# Altium PCB OSSI-1 EPS.PcbDoc
Units mil, origin at the board's own origin, x right, y up, seen from the top; angles counter-clockwise.
Board outline 3701 x 3465 mil, 2 copper layers (Top, Bottom), stack 34.252 mil thick; 102 components, 90 nets, 321 pads, 139 vias.
Unrouted connection lines stored in the file: 2.
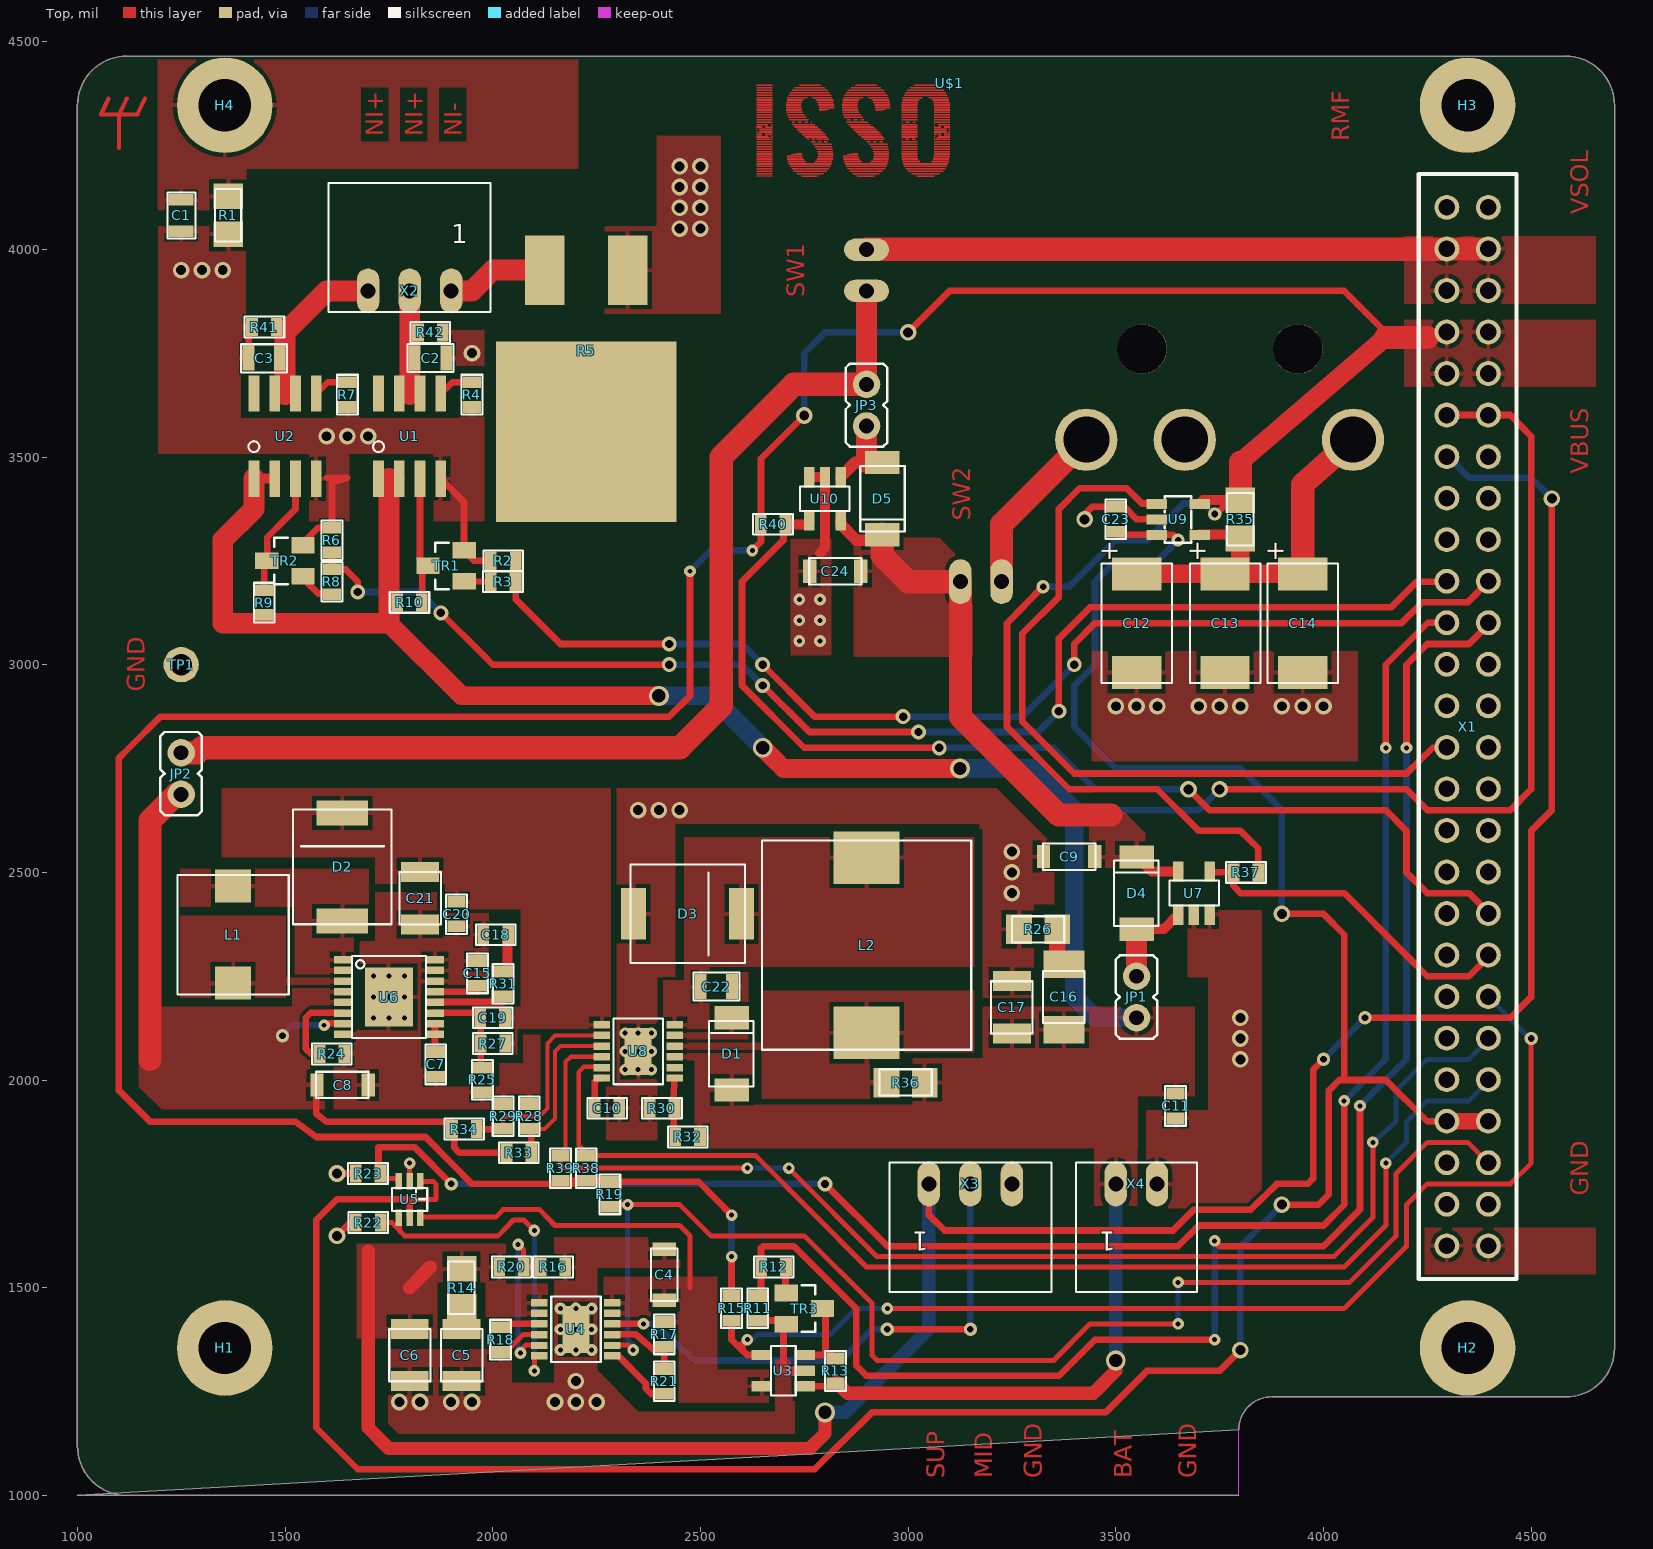
[diagram p0: Top view]
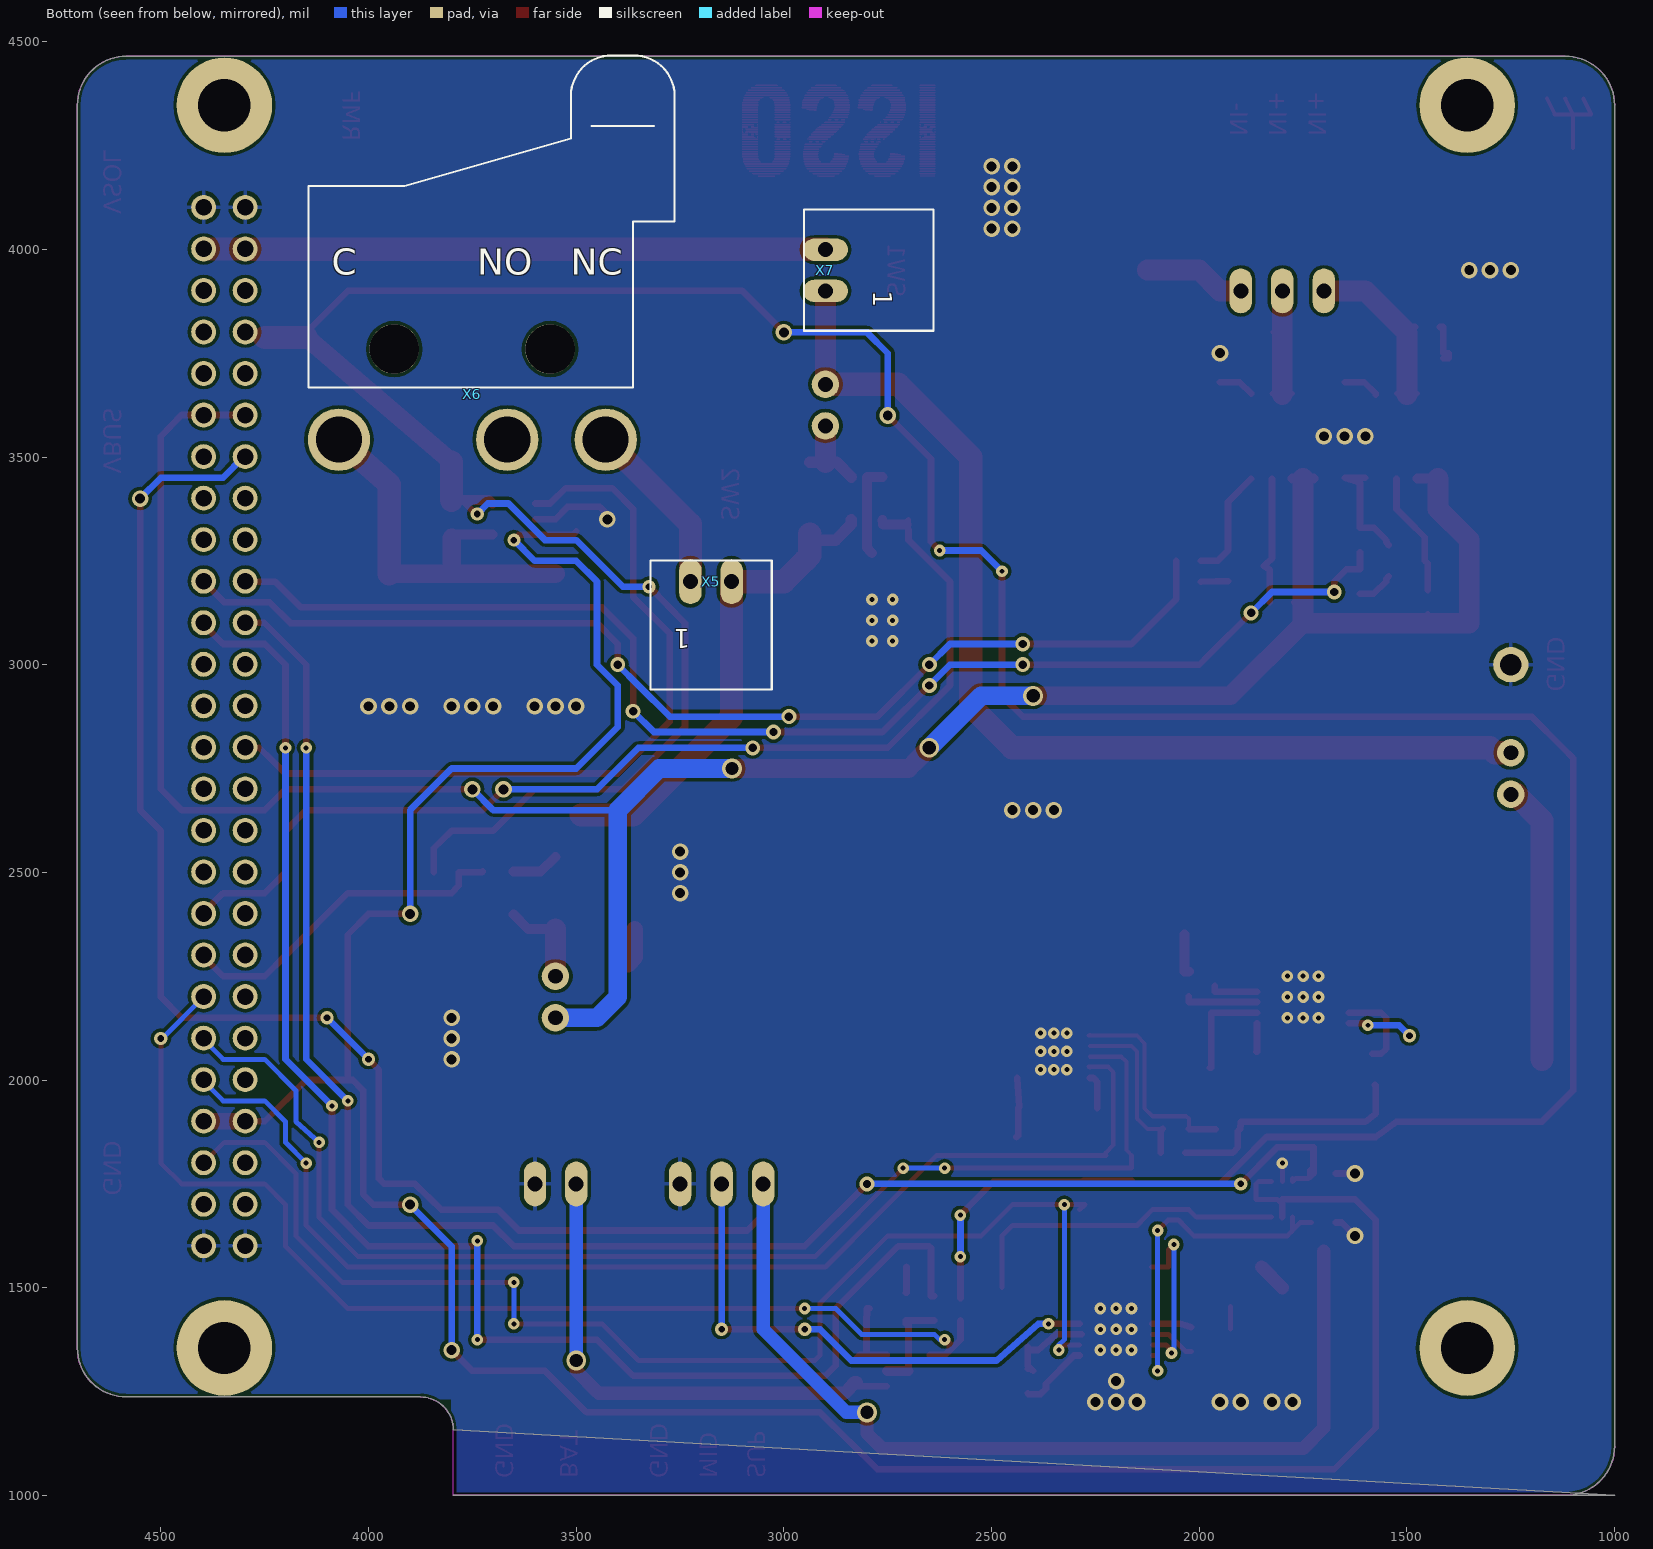
[diagram p1: Bottom view, seen from below]

## Layer stack, top to bottom
Top Solder: solder mask 0.4, Solder Resist, Dk 3.5
Top: signal copper 1.378
Dielectric 1: core 31.4961, FR-4, Dk 4.8
Bottom: signal copper 1.378
Bottom Solder: solder mask 0.4, Solder Resist, Dk 3.5

## Board outline
3796,1000 1119,1000 cw(c1119,1119) 1000,1119 1000,4347 cw(c1118.5,4346.5) 1119,4465 4583,4465 cw(c4583,4347) 4701,4347 4701,1355 cw(c4583,1355) 4583,1237 3875,1237 ccw(c3875,1158) 3796,1158 1000,1000

## Design rules (kind name [scope] priority, off if disabled: settings)
Clearance mdViaVia [IsVia vs IsVia] p1: gap=8
Clearance mdPadVia [IsPad vs IsVia] p2: gap=8
Clearance mdPadPad [IsPad vs IsPad] p3: gap=8
Clearance mdWireVia [(InLayerClass('Signal Layers') AND IsTrack) vs IsVia] p4: gap=8
Clearance mdWirePad [(InLayerClass('Signal Layers') AND IsTrack) vs IsPad] p5: gap=8
Clearance mdWireWire [(InLayerClass('Signal Layers') AND IsTrack) vs (InLayerClass('Signal Layers') AND IsTrack)] p6: gap=8
Clearance [All] p7: gap=8
HoleSize [All] p1: absolutevalues=TRUE maxlimit=100000 minlimit=10 maxpercent=80.000 minpercent=20.000
HoleToHoleClearance [All] p1: gap=8 allowstackedmicrovias=TRUE
PolygonConnect ThermalVias [IsVia] p1: connectstyle=Direct reliefconductorwidth=10 reliefentries=4 polygonreliefangle="90 Angle" airgapwidth=10
PolygonConnect [All] p2: connectstyle=Relief reliefconductorwidth=10 reliefentries=4 polygonreliefangle="90 Angle" airgapwidth=10
RoutingVias [All] p1: holewidth=28 width=50 viastyle="Through Hole" minholewidth=28 minwidth=50 maxholewidth=28 maxwidth=50
SilkToSilkClearance [All] p1 off: silktosilkclearance=10
SilkToSolderMaskClearance [IsPad] p1 off: minsilkscreentomaskgap=10 clearancetoexposedcopper=TRUE
SolderMaskExpansion [All] p1: expansion=4
Width [All] p1: maxlimit=100000 minlimit=10 preferedwidth=10
26 further rules are at their usual default settings.

## Components (designator, comment, footprint, x,y, rotation, side; value= is the part's Value field where it differs from the comment)
C1 "100nF" C0805(2012) 1250,4082 r270 top
C2 "1uF, 0805" C0805(2012) 1850,3738 r0 top
C3 "1uF, 0805" C0805(2012) 1450,3738 r180 top
C4 "2.2uF" C1206-GCM31 2413,1531 r90 top
C5 "22uF" C1210-GCM32 1925,1338 r270 top
C6 "22uF" C1210-GCM32 1800,1338 r270 top
C7 "100pF" C0603(1608) 1863,2038 r270 top
C8 "2.2uF" C1206-GCM31 1638,1988 r0 top
C9 "4.7uF, 1206" C1206-GCM31 3388,2538 r180 top
C10 "0 Ohm" C0603(1608) 2275,1932 r0 top
C11 "22nF" C0603(1608) 3644,1938 r270 top
C12 "220uF" C2917(7343)-Y 3550,3100 r270 top
C13 "220uF" C2917(7343)-Y 3763,3100 r270 top
C14 "220uF" C2917(7343)-Y 3950,3100 r270 top
C15 "0.1uF" C0603(1608) 1963,2257 r270 top
C16 "" C1210-TMK325 3375,2200 r90 top
C17 "10uF" C1210-GCM32 3250,2175 r90 top
C18 "10nF" C0603(1608) 2007,2350 r0 top
C19 "470pF" C0603(1608) 2000,2150 r180 top
C20 "0.1uF" C0603(1608) 1913,2400 r270 top
C21 "10uF" C1210-GCM32 1825,2438 r270 top
C22 "1uF, 100V, 1206" C0805(2012) 2538,2225 r0 top
C23 "0.1uF" C0603(1608) 3500,3350 r90 top
C24 "4.7uF, 1206" C1206-GCM31 2825,3225 r180 top
D1 "PMEG6020EP" PMEG6020EP 2575,2063 r90 top
D2 "STPS5L60" STPS5L60 1638,2513 r90 top
D3 "STPS5L60" STPS5L60 2469,2400 r0 top
D4 "PMEG3050BEP" PMEG6020EP 3550,2450 r90 top
D5 "PMEG3050BEP" PMEG6020EP 2938,3400 r270 top
H1 "" 3.2-PAD-ROUND 1355,1355 r0 top
H2 "" 3.2-PAD-ROUND 4347,1355 r0 top
H3 "" 3.2-PAD-ROUND 4347,4347 r0 top
H4 "" 3.2-PAD-ROUND 1355,4347 r0 top
JP1 "" JP1 3550,2200 r180 top
JP2 "" JP1 1250,2738 r180 top
JP3 "" JP1 2900,3625 r0 top
L1 "4.7uH" RLF7030 1375,2350 r90 top
L2 "10uH" RLF12545 2900,2325 r270 top
R1 "511" WSL1206 1363,4082 r90 top
R2 "100k" R0603(1608) 2025,3250 r0 top
R3 "1.5k" R0603(1608) 2025,3200 r180 top
R4 "1.2k" R0603(1608) 1950,3650 r90 top
R5 "1R5, 20W, 1%" PWR263S-20 2225,3950 r180 top
R6 "100k" R0603(1608) 1613,3300 r270 top
R7 "1.2k" R0603(1608) 1650,3650 r90 top
R8 "1.5k" R0603(1608) 1613,3200 r270 top
R9 "100k" R0603(1608) 1450,3150 r270 top
R10 "100k" R0603(1608) 1800,3150 r180 top
R11 "100k" R0603(1608) 2638,1450 r90 top
R12 "1.5k" R0603(1608) 2676,1550 r0 top
R13 "470k" R0603(1608) 2825,1300 r270 top
R14 "511" WSL1206 1925,1500 r90 top
R15 "470k" R0603(1608) 2575,1450 r90 top
R16 "750k" R0603(1608) 2145,1550 r0 top
R17 "1.5M" R0603(1608) 2413,1388 r270 top
R18 "2k" R0603(1608) 2019,1375 r90 top
R19 "470k" R0603(1608) 2282,1725 r270 top
R20 "1.5M" R0603(1608) 2045,1550 r0 top
R21 "750k" R0603(1608) 2413,1275 r270 top
R22 "470k" R0603(1608) 1700,1657 r0 top
R23 "470k" R0603(1608) 1700,1775 r180 top
R24 "17.8k" R0603(1608) 1613,2063 r180 top
R25 "30.9k" R0603(1608) 1975,2000 r90 top
R26 "0.1" WSL1206 3313,2363 r180 top
R27 "169k" R0603(1608) 2000,2088 r0 top
R28 "100k" R0603(1608) 2088,1913 r270 top
R29 "100k" R0603(1608) 2025,1913 r270 top
R30 "1.5M" R0603(1608) 2407,1932 r0 top
R31 "4.3k" R0603(1608) 2025,2232 r270 top
R32 "300k" R0603(1608) 2469,1863 r0 top
R33 "200k" R0603(1608) 2063,1825 r180 top
R34 "36k" R0603(1608) 1932,1882 r180 top
R35 "10m" WSL1206 3800,3350 r90 top
R36 "0.05" WSL1206 2994,1994 r0 top
R37 "470k" R0603(1608) 3813,2500 r0 top
R38 "470k" R0603(1608) 2225,1788 r270 top
R39 "470k" R0603(1608) 2163,1788 r270 top
R40 "470k" R0603(1608) 2675,3338 r180 top
R41 "1M" R0603(1608) 1450,3813 r0 top
R42 "1M" R0603(1608) 1850,3800 r180 top
TP1 "TP" TP-13 1250,3000 r0 top
TR1 "FDV301N" SOT23 1888,3238 r90 top
TR2 "FDV301N" SOT23 1500,3250 r90 top
TR3 "FDV301N" SOT23 2750,1450 r270 top
U1 "MAX890L" SO8 1800,3550 r0 top
U2 "MAX890L" SO8 1500,3550 r0 top
U3 "LTC4411" TSOT23-5 2700,1300 r90 top
U4 "LTC4425" MSE 2200,1400 r270 top
U5 "SN74LVC1T45-EP" SOT-6DCK 1800,1713 r180 top
U6 "LT3479" TSSOP16-FE 1750,2200 r270 top
U7 "LTC4411" TSOT23-5 3688,2450 r0 top
U8 "LT3652" MSE 2350,2069 r270 top
U9 "MAX4376" SOT23-5DBV 3650,3350 r270 top
U10 "LTC4411" TSOT23-5 2800,3400 r180 top
U$1 "" OSSILOGORECT1005 3100,4400 r180 top
X1 "ESQ-126-38-G-D" ESQ-126-XX-X-D 4347,2851 r0 top
X2 "5268-03" 5268-03 1800,3900 r0 top
X3 "5268-03" 5268-03 3150,1750 r180 top
X4 "5268-02" 5628-02 3550,1750 r180 top
X5 "5268-02" 5628-02 3175,3200 r0 bottom
X6 "" E62-10K 3363,3667 r180 bottom
X7 "5268-02" 5628-02 2900,3950 r270 bottom

## Footprints (in the part's own frame and the unit in brackets; to place one, negate y for a bottom-side part, rotate by r counter-clockwise, add the part's x,y. Pads: shape width x height; smd on the part's side, far side on the other; paste and mask are expansions set on the pad)
3.2-PAD-ROUND [mil] "3.2-PAD-ROUND"
  round 230 hole 126: B3,2(0,0)
5268-03 [mil] "5268-03"
  oval 54x108 hole 36: 1(100,0) 2(0,0) 3(-100,0)
  silkscreen extent -195,-51 195,260
5628-02 [mil] "5628-02"
  oval 54x108 hole 36: 1(50,0) 2(-49.21,0)
  silkscreen extent -146,-51 146,260
C0603(1608) [mil] "C0603(1608)"
  rect 28x44 smd: 1(-29.53,0) 2(30,0)
  silkscreen extent -47,-25 48,25
C0805(2012) [mil] "C0805(2012)"
  rect 28x60 smd: 1(-37.4,0) 2(38,0)
  silkscreen extent -55,-33 56,34
C1206-GCM31 [mil] "C1206-GCM31"
  rect 32x56 smd: P$1(-61.02,0) P$2(62,0)
  silkscreen extent -63,-31 63,32
C1210-GCM32 [mil] "C1210-GCM32"
  rect 48x91 smd: P$1(-62.99,0) P$2(63,0)
  silkscreen extent -63,-49 63,50
C1210-TMK325 [mil] "C1210-TMK325"
  rect 67x99 smd: P$1(-78.74,0) P$2(79,0)
  silkscreen extent -63,-49 63,50
C2917(7343)-Y [mil] "C2917(7343)-Y"
  rect 79x119 smd: 1(-118.11,0) 2(119,0)
  silkscreen extent -144,-85 144,85
E62-10K [mil] "E62-10K"
  round 119 hole 119: 1(-575.2,93) 1(-200,93)
  round 150 hole 111: C(-708.27,-125.2) NC(-66.14,-125.2) NO(-303.15,-125.2)
  silkscreen extent -781,0 100,800
ESQ-126-XX-X-D [mil] "ESQ-126-XX-X-D"
  round 60 hole 40: 1(-50,1250) 2(50,1250) 3(-50,1150) 4(50,1150) 5(-50,1050) 6(50,1050) 7(-50,950) 8(50,950) 9(-50,850) 10(50,850) 11(-50,750) 12(50,750) 13(-50,650) 14(50,650) 15(-50,550) 16(50,550) 17(-50,450) 18(50,450) 19(-50,350) 20(50,350) 21(-50,250) 22(50,250) 23(-50,150) 24(50,150) 25(-50,50) 26(50,50) 27(-50,-50) 28(50,-50) 29(-50,-150) 30(50,-150) 31(-50,-250) 32(50,-250) 33(-50,-350) 34(50,-350) 35(-50,-450) 36(50,-450) 37(-50,-550) 38(50,-550) 39(-50,-650) 40(50,-650) 41(-50,-750) 42(50,-750) 43(-50,-850) 44(50,-850) 45(-50,-950) 46(50,-950) 47(-50,-1050) 48(50,-1050) 49(-50,-1150) 50(50,-1150) 51(-50,-1250) 52(50,-1250)
  silkscreen extent -117,-1330 118,1330
JP1 [mil] "JP1"
  round 66 hole 36: 1(0,-50) 2(0,50)
  silkscreen extent -50,-100 50,100
MSE [mil] "MSE"
  rect 18x40 smd: 1(-63.98,-87.91) 2(-38.39,-87.91) 3(-12.8,-87.91) 4(13,-87.91) 5(39,-87.91) 6(64,-87.91) 7(64,88) 8(39,88) 9(13,88) 10(-12.8,88) 11(-38.39,88) 12(-63.98,88)
  rect 113x65 smd: 13(0,0)
  silkscreen extent -79,-59 79,60
OSSILOGORECT1005 [mil] "OSSILOGORECT1005"
  Top drawing of 1356 lines, arcs and shapes, not listed
PMEG6020EP [mil] "PMEG6020EP"
  rect 56x83 smd: A(-86.61,0) C(87,0)
  silkscreen extent -79,-53 79,54
PWR263S-20 [mil] "PWR263S-20"
  rect 95x167 smd: P$1(-100,0) P$2(100,0)
  rect 434x434 smd: TPAD(0,389)
R0603(1608) [mil] "R0603(1608)"
  rect 28x44 smd: 1(-29.53,0) 2(30,0)
  silkscreen extent -47,-25 48,25
RLF7030 [mil] "RLF7030"
  rect 79x87 smd: P$1(-116.14,0) P$2(117,0)
  silkscreen extent -144,-134 144,134
RLF12545 [mil] "RLF12545"
  rect 126x158 smd: P$1(-210.63,0) P$2(211,0)
  silkscreen extent -252,-252 252,252
SO8 [mil] "SO8"
  rect 26x87 smd: 1(-75,-102.36) 2(-25,-102.36) 3(25,-102.36) 4(75,-102.36) 5(75,103) 6(25,103) 7(-25,103) 8(-75,103)
  silkscreen extent -88,-38 -62,-12
SOT23 [mil] "SOT23"
  rect 40x56 smd: 1(-37.4,-43.31) 2(38,-43.31) 3(0,44)
  silkscreen extent -56,-6 56,26
SOT23-5DBV [mil] "SOT23-5DBV"
  rect 24x49 smd: 1(-37.4,-51.18) 2(0,-51.18) 3(38,-51.18) 4(38,52) 5(-37.4,52)
  silkscreen extent -56,-32 56,32
SOT-6DCK [mil] "SOT-6DCK"
  rect 16x40 smd: 1(-25.59,-43.31) 2(0,-43.31) 3(26,-43.31) 4(26,44) 5(0,44) 6(-25.59,44)
  silkscreen extent -42,-28 43,28
STPS5L60 [mil] "STPS5L60"
  rect 61x124 smd: A(-129.92,0) C(130,0)
  silkscreen extent -138,-118 138,119
TP-13 [mil] "TP-13"
  round 85 hole 52: TP(0,0)
TSOT23-5 [mil] "TSOT23-5"
  rect 25x49 smd: P$1(-37.4,-51.57) P$2(0,-51.57) P$3(38,-51.57) P$4(38,52) P$5(-37.4,52)
  silkscreen extent -59,-30 60,30
TSSOP16-FE [mil] "TSSOP16-FE"
  rect 18x44 smd: 1(-89.57,-110.24) 2(-63.98,-110.24) 3(-38.39,-110.24) 4(-12.8,-110.24) 5(13,-110.24) 6(39,-110.24) 7(64,-110.24) 8(90,-110.24) 9(90,111) 10(64,111) 11(39,111) 12(13,111) 13(-12.8,111) 14(-38.39,111) 15(-63.98,111) 16(-89.57,111)
  rect 141x116 smd: PPAD(0,0)
  silkscreen extent -98,-89 99,89
WSL1206 [mil] "WSL1206"
  rect 62x71 smd: P$1(-45.87,0) P$2(46,0)
  silkscreen extent -63,-31 63,32

## Part data
C1 C2 C3 C22: library part C0805(2012)
C4 C8 C9 C24: library part C1206-GCM31
C5 C6 C17 C21: library part C1210-GCM32
C7 C10 C11 C15 C18 C19 C20 C23: library part C0603(1608)
C12 C13 C14: library part C2917(7343)-Y
C16: library part C1210-TMK325
D4 D5: library part PMEG6020EP
H1 H2 H3 H4: library part 3.2-PAD-ROUND
JP1 JP2 JP3: library part JP1
L1: library part RLF7030
L2: library part RLF12545
R1 R14 R26 R35 R36: library part WSL1206
R2 R3 R4 R6 R7 R8 R9 R10 R11 R12 R13 R15 R16 R17 R18 R19 R20 R21 R22 R23 R24 R25 R27 R28 R29 R30 R31 R32 R33 R34 R37 R38 R39 R40 R41 R42: library part R0603(1608)
R5: library part PWR263S-20
TP1: library part TP-13
TR1 TR2 TR3: library part SOT23
U1 U2: library part SO8
U3 U7 U10: library part TSOT23-5
U4 U8: library part MSE
U5: library part SOT-6DCK
U6: library part TSSOP16-FE
U9: library part SOT23-5DBV
U$1: library part OSSILOGORECT1005
X1: library part ESQ-126-XX-X-D
X4 X5 X7: library part 5628-02
X6: library part E62-10K

## Via types
v1: diameter 28/28 (per signal layer), hole 12, Top to Bottom, 60 vias
v2: diameter 40/40 (per signal layer), hole 24, Top to Bottom, 52 vias
v3: diameter 36/36 (per signal layer), hole 20, Top to Bottom, 12 vias
v4: diameter 32/32 (per signal layer), hole 16, Top to Bottom, 10 vias
v5: diameter 48/48 (per signal layer), hole 32, Top to Bottom, 5 vias

## Nets (pads, with @x,y where several pads share a name; then routed paths per layer and width w, separated by ;. In a path a pad name is that pad's centre, name@x,y a point inside that pad or via, vN(x,y) a via of type N, cw(c..) or ccw(c..) an arc to the next point about the centre after c; other vN are vias at no path point)
3.3VOBC: C23.1 U5.1 U5.5 U9.3 X1.45 X1.46 | length 6886.5
  Top w12: U5.5@1800,1670 1800,1700 1813,1713 1863,1713 1863,1750 1857,1756 U5.1@1826,1756 ; U9.3@3599,3313 U9.3@3600,3313
  Top w16: U5.5@1800,1670 1800,1713 1625,1713 1575,1663 1575,1163 1675,1063 2775,1063 2913,1200 3475,1200 3575,1300 3750,1300 v2(3800,1350) ; C23.1@3500,3321 3508,3313 U9.3@3599,3313 ; U9.3@3600,3313 3638,3313 v4(3650,3300) ; v2(3900,1700) 3988,1700 4013,1725 4013,1975 4038,2000 ; v2(3900,2400) 4000,2400 4050,2350 4050,2200 4050,2000 ; X1.45 4250,1901 4150,2000 ; 4038,2000 4050,2000 ; 4038,2000 4050,2000 ; 4050,2000 4150,2000 ; 4050,2000 4150,2000 ; 4050,2000 4150,2000
  Top w40: X1.45 4300,1901 4300,1900 4301,1901 X1.46
  Bottom w16: v4(3650,3300) 3600,3250 3500,3250 3450,3200 3450,3000 3400,2950 3400,2850 3450,2800 3500,2750 3800,2750 3900,2650 v2(3900,2400) ; v2(3800,1350) 3800,1600 v2(3900,1700)
ANT_COIL1: C3.1 R41.2 U2.6 U2.7 X2.3 | length 520
  Top w12: U2.7 1498,3653 1500,3650 1503,3653 U2.6 ; C3.1@1488,3738 1488,3763 C3.1@1500,3750
  Top w16: R41.2 1513,3813
  Top w50: 1500,3650 1500,3750 1500,3800 1513,3813 1600,3900 X2.3
ANT_COIL2: C2.1 R42.2 U1.6 U1.7 X2.2 | length 366.9
  Top w12: U1.7 1798,3653 1800,3650 1823,3650 U1.6 ; C2.1@1800,3750 C2.1@1813,3738
  Top w16: 1800,3775 1800,3800 R42.2@1821,3800
  Top w50: 1800,3650 1800,3750 1800,3775 X2.2
ANT_DEPLOY1: R6.2 R8.1 X1.19 | length 3155.5
  Top w16: R6.2@1613,3271 1613,3230 1646,3230 1675,3200 v3(1675,3175) ; v3(1875,3125) 1975,3025 2000,3000 2025,3000 v3(2425,3000) ; v3(2650,2950) 2763,2838 v3(3025,2838) ; v3(3363,2888) 3363,3063 3438,3138 4163,3138 4225,3200 4297,3200 X1.19
  Bottom w16: v3(1675,3175) 1800,3175 1825,3175 v3(1875,3125) ; v3(2425,3000) 2600,3000 v3(2650,2950) ; v3(3025,2838) 3313,2838 v3(3363,2888)
ANT_DEPLOY2: R2.2 R3.1 X1.20 | length 2715.8
  Top w16: R2.2 2055,3200 2055,3158 2163,3050 v3(2425,3050) ; v3(2650,3000) 2775,2875 v3(2988,2875) ; v3(3400,3000) 3400,3050 3450,3100 4188,3100 4238,3150 4347,3150 X1.20
  Bottom w16: v3(2425,3050) 2500,3050 2600,3050 v3(2650,3000) ; v3(2988,2875) 3275,2875 3350,2950 v3(3400,3000)
BAT_-CHRG: R39.1 U8.4 X1.42 | length 3044.4
  Top w10: R39.1@2163,1818 2163,1819 2175,1832 2175,2044 2188,2056 U8.4@2263,2056
  Top w12: R39.1@2163,1818 2163,1788 v1(2613,1788) ; v1(2713,1788) 2925,1575 3750,1575 4025,1575 4119,1669 v1(4119,1850)
  Bottom w12: v1(2613,1788) v1(2713,1788) ; v1(4119,1850) 4175,1900 4175,1975 4250,2050 4350,2050 4397,2097 X1.42
BAT_-FAULT: R38.1 U8.5 X1.44 | length 2867.6
  Top w10: R38.1@2225,1818 2225,1825 2207,1844 2207,2019 2219,2032 2267,2032 U8.5@2263,2031
  Top w12: R38.1@2225,1818 2633,1818 2900,1550 3750,1550 4050,1550 4150,1650 v1(4150,1800)
  Bottom w12: v1(4150,1800) 4200,1850 4200,1900 4250,1950 4350,1950 4397,1997 X1.44
BAT_-ON: R37.1 U7.P$4 X1.38 | length 818.9
  Top w16: U7.P$4@3725,2502 3727,2500 3783,2500 3783,2468 3800,2450 3850,2450 4050,2450 4200,2300 4250,2250 4350,2250 4397,2297 X1.38
BAT_TEMP: X1.47
BEACON_-FAULT: X1.30
BEACON_OFF: X1.24
BEACON_SCL: X1.37
BEACON_SDA: X1.39
BUS_CS: U9.1 X1.27 | length 1926.4
  Top w16: U9.1@3599,3388 3563,3388 3525,3425 3413,3425 3363,3375 3363,3163 3275,3075 3275,2863 3400,2738 4200,2738 4263,2800 4300,2800 4300,2801 X1.27
COMMS_-FAULT: X1.32
COMMS_OFF: X1.25
COMMS_SCL: X1.41
COMMS_SDA: X1.43
GND: C1.2 C2.2 C3.2 C4.P$2 C5.P$2 C6.P$2 C7.2 C8.P$2 C9.P$2 C10.2 C11.2 C12.2 C13.2 C14.2 C15.1 C17.P$2 C18.1 C20.2 C21.P$2 C23.2 C24.P$2 D3.A R1.P$1 R2.1 R4.1 R5.P$1 R6.1 R7.1 R11.1 R16.2 R18.1 R22.1 R23.2 R24.1 R25.1 R26.P$2 R28.1 R29.1 R30.1 R41.1 R42.1 TP1.TP TR1.2 TR2.2 TR3.2 U1.4 U2.4 U3.P$2 U4.4 U4.13 U5.2 U6.8 U6.14 U6.15 U6.16 U6.PPAD U7.P$2 U7.P$3 U8.13 U9.2 U10.P$2 U10.P$3 X1.1 X1.2 X1.51 X1.52 X3.3 X4.2 | length 1647.4
  Top w12: U5.2@1800,1756 v1(1800,1800) ; R18.1@2019,1346 2032,1346 2074,1388 U4.4@2113,1388
  Top w16: C3.2@1413,3738 1400,3738 1400,3750 1413,3750 1413,3813 R41.1@1421,3813 ; TR2.2@1544,3288 1550,3295 1550,3300 1580,3330 1613,3330 1613,3438 1650,3450 1600,3450 ; v2(1625,1625) 1657,1657 R22.1@1671,1657 ; v2(1625,1775) R23.2@1671,1775 ; U1.4@1875,3448 1931,3392 1931,3275 1956,3250 R2.1@1996,3250 ; R11.1@2638,1421 2707,1421 2707,1413 2700,1413 2700,1300 ; v2(3425,3350) 3425,3363 3443,3380 C23.2 3521,3380 3550,3350 U9.2@3599,3350
  Top w24: 2700,1300 U3.P$2@2752,1300 ; 2788,3269 2800,3282 U10.P$2@2800,3450 ; U10.P$2@2800,3452 U10.P$2@2800,3450 ; U10.P$2@2800,3450 2794,3450 2793,3452 2763,3452 2799,3452 U10.P$2@2800,3450
  other v1: 2163,1350 2200,1350 2238,1350 2163,1400 2200,1400 2238,1400 2163,1450 2200,1450 2238,1450 2319,2025 2350,2025 2382,2025 2319,2069 2350,2069 2382,2069 2319,2113 2350,2113 2382,2113 1713,2150 1750,2150 1788,2150 1713,2200 1750,2200 1788,2200 1713,2250 1750,2250 1788,2250 2738,3057 2788,3057 2738,3107 2788,3107 2738,3157 2788,3157
  other v2: 1775,1225 1825,1225 1900,1225 1950,1225 2150,1225 2200,1225 2250,1225 2200,1275 3800,2050 3800,2100 3800,2150 3250,2450 3250,2500 3250,2550 2350,2650 2400,2650 2450,2650 3500,2900 3550,2900 3600,2900 3700,2900 3750,2900 3800,2900 3900,2900 3950,2900 4000,2900 1600,3550 1650,3550 1700,3550 1950,3750 1250,3950 1300,3950 1350,3950 2450,4050 2500,4050 2450,4100 2500,4100 2450,4150 2500,4150 2450,4200 2500,4200
LED_-FAULT: X1.28
LED_OFF: X1.23
LED_SCL: X1.33
LED_SDA: X1.35
N$1: L1.P$1 U6.3
N$2: R29.2 R34.1 U8.2 | length 508.8
  Top w10: R29.2 2025,1907 2032,1913 2113,1913 2132,1932 2132,2088 2150,2107 2267,2107 U8.2@2263,2108
  Top w16: R34.1@1961,1882 2024,1882 R29.2
N$3: C19.1 C20.1 C21.P$1 D2.C R27.2 U8.1
N$4: C16.P$2 R26.P$1 | length 90.3
  Top w40: R26.P$1@3359,2363 3359,2296 C16.P$2
N$5: C15.2 U6.13 | length 116
  Top w16: U6.13@1861,2213 1963,2213 C15.2
N$6: D2.A L1.P$2 U6.1 U6.2
N$7: C18.2 R31.1 | length 100
  Top w24: R31.1@2025,2261 2036,2261 C18.2@2036,2350
N$8: R31.2 U6.12 | length 178
  Top w16: U6.12@1861,2188 2025,2188 R31.2
N$9: C19.2 R25.2 R27.1 U6.11 | length 246
  Top w16: U6.11@1861,2162 1971,2162 1971,2150 1971,2088 1971,2030 R25.2
N$10: C7.1 U6.9 U6.10 | length 71
  Top w16: U6.10@1861,2137 1861,2111 1861,2068 C7.1@1863,2068
N$11: R24.2 U6.6 | length 207.7
  Top w16: R24.2 1563,2063 1550,2075 1550,2150 1562,2162 U6.6@1640,2162
N$12: R28.2 R33.1 U8.3 | length 413.4
  Top w10: R28.2 2090,1882 2125,1882 2150,1907 2150,2069 2163,2082 U8.3@2263,2082
  Top w16: R28.2 2093,1879 R33.1@2093,1825
N$13: C22.2 D1.C U8.11
N$14: R16.1 R20.2 U4.5 | length 421.3
  Top w12: v1(2061,1604) 2074,1591 2074,1550 R16.1@2115,1550 ; v1(2067,1343) 2067,1350 2080,1362 2112,1362 U4.5@2113,1362
  Bottom w12: v1(2061,1604) 2061,1350 v1(2067,1343)
N$16: C22.1 D3.C L2.P$1 U8.12
N$17: R30.2 R32.1 U8.7 | length 145.4
  Top w16: U8.7 2433,1935 2436,1932 2436,1866 R32.1@2440,1863
N$18: C9.P$1 C24.P$1 D4.C D5.C U7.P$5 U10.P$5 X5.2 | length 1298.9
  Top w24: D4.C 3586,2502 U7.P$5@3651,2502
  Top w28: U10.P$5@2838,3349 2838,3338 2875,3300 2925,3300 D5.C@2938,3314
  Top w56: D5.C@2938,3314 2938,3263 2950,3250 3000,3200 3126,3200 3126,2875 3363,2638 3488,2638
N$19: C10.1 U8.6 | length 84.7
  Top w16: C10.1@2246,1932 2246,1996 2250,2000 2255,2005 U8.6@2263,2005
N$20: R22.2 U4.6 U5.4 | length 850.6
  Top w12: R22.2 1757,1657 1788,1625 ; U5.4@1775,1670 1775,1638 1788,1625 ; v1(2100,1300) 2100,1313 2100,1338 2102,1337 U4.6@2113,1337 ; v1(2100,1638) 2075,1663 2050,1663 2013,1625 1788,1625
  Bottom w12: v1(2100,1638) v1(2100,1300) v1@2101,1300
N$21: C5.P$1 R14.P$1 | length 54
  Top w12: C5.P$1 1925,1450 R14.P$1@1925,1455
N$22: R13.1 TR3.3 U3.P$3 | length 223.3
  Top w16: U3.P$3@2752,1338 2800,1338 ; TR3.3 2800,1450 2801,1413 2801,1350 2800,1338 ; 2800,1338 R13.1@2818,1338 ; 2800,1338 R13.1@2818,1338 ; R13.1@2818,1338 2825,1330 R13.1@2818,1338
N$23: R12.2 TR3.1 | length 64
  Top w16: R12.2@2705,1550 2705,1488 TR3.1@2707,1488
N$24: C12.1 C13.1 C14.1 R35.P$1 U9.4 X6.C | length 964.5
  Top w24: U9.4@3702,3313 3792,3313 R35.P$1@3800,3305
  Top w45: C12.1@3550,3219 3763,3219 C13.1@3800,3219 ; R35.P$1@3800,3305 C13.1@3800,3219 ; C14.1@3950,3219 C13.1@3800,3219
  Top w56: C14.1@3950,3219 3950,3434 X6.C@4071,3542
N$29: R17.2 R21.1 U4.9 | length 225.9
  Top w16: U4.9@2283,1388 2288,1388 2344,1388 2388,1350 2400,1350 2405,1350 R17.2 2413,1313 2400,1300 2405,1305 R21.1@2413,1305
N$31: R21.2 U4.7 | length 171.7
  Top w16: U4.7@2288,1337 2302,1337 2369,1269 2369,1257 2382,1244 2411,1244 R21.2@2413,1246
N$33: R3.2 TR1.1 | length 65
  Top w16: TR1.1@1931,3201 1959,3201 R3.2@1996,3200
N$37: U2.8
N$38: U1.8
N$39: D5.A JP3.1 U10.P$1 | length 202.5
  Top w28: U10.P$1@2838,3452 2873,3487 2900,3487 D5.A@2938,3487
  Top w50: D5.A@2900,3487 JP3.1
N$40: R18.2 U4.3 | length 95.2
  Top w16: R18.2 2046,1413 U4.3@2113,1413
N$42: D4.A JP1.1 U7.P$1 | length 229.5
  Top w24: D4.A@3550,2364 3616,2364 U7.P$1@3651,2399
  Top w50: JP1.1 D4.A@3550,2364
N$44: C8.P$1 JP2.2 R33.2 R34.2 U6.4 U6.5 U6.7 | length 1441.3
  Top w16: v4(1494,2107) v4@1500,2100 ; C8.P$1 1575,1987 1575,1919 1600,1900 1900,1900 1900,1894 R34.2 1907,1877 1907,1838 1919,1825 R33.2 ; v1(1594,2132) 1599,2137 U6.7@1640,2137
  Top w56: 1175,2050 1175,2625 1238,2688 JP2.2
  Bottom w16: v4(1494,2107) 1519,2132 v1(1594,2132)
N$46: JP2.1 JP3.2 X7.1 | length 2594.9
  Top w50: JP3.2 X7.1@2900,3901
  Top w56: JP2.1 1288,2788 1300,2800 1350,2800 2450,2800 2550,2900 2550,3500 2700,3650 2725,3675 JP3.2
N$49: R8.2 TR2.1 | length 89.9
  Top w16: TR2.1@1544,3213 1550,3206 1550,3200 1580,3171 R8.2@1613,3171
N$50: R9.1 TR2.3 U2.3 | length 299.4
  Top w16: R9.1@1450,3180 1450,3244 1457,3250 1457,3307 1500,3350 1525,3375 U2.3@1525,3448
N$51: R10.1 TR1.3 U1.3 | length 315.9
  Top w16: U1.3@1825,3448 1825,3256 TR1.3@1845,3238 ; R10.1@1830,3150 1830,3228 TR1.3@1845,3238 ; TR1.3@1845,3237 TR1.3@1845,3238
N$52: R7.2 U2.5 | length 91.9
  Top w16: R7.2 1603,3680 U2.5 ; U2.5 1575,3650 U2.5
N$53: R4.2 U1.5 | length 85.9
  Top w16: U1.5 1903,3680 R4.2
N$54: X5.1 X6.NC | length 426.5
  Top w56: X5.1 3225,3338 X6.NC@3429,3542
N$56: 
N$57: R5.P$2 X2.1 | length 245.7
  Top w50: X2.1 1950,3900 2000,3950 2100,3950 R5.P$2
N$58:  | length 75
  Top w10: 1100,4244 1100,4319
N$59:  | length 214
  Top w10: 1075,4363 1057,4325 1100,4325 ; 1119,4363 1100,4325 ; 1163,4363 1144,4325 1100,4325
OBC_-FAULT: X1.34
OBC_OFF: X1.26
PANELTEMP_SCL: X1.29
PANELTEMP_SDA: X1.31
SC_-ON: R15.1 U3.P$4 X1.40 | length 2786.2
  Top w12: v1(2950,1450) 3975,1450 4050,1450 4150,1550 4200,1600 4200,1700 4250,1750 4450,1750 4500,1800 v4(4500,2100)
  Top w16: R15.1@2575,1421 2575,1375 2600,1350 ; v1(2613,1375) 2600,1363 2600,1350 ; 2600,1350 2613,1338 ; 2600,1350 2613,1338 ; 2613,1338 2649,1338 2613,1338
  Bottom w12: v1(2613,1375) 2625,1375 2638,1388 2813,1388 2875,1450 v1(2950,1450) ; X1.40 4497,2100 v4(4500,2100)
SC_-PFO: R19.2 U4.8 X1.48 | length 3173.3
  Top w12: R19.2@2282,1696 2282,1694 2288,1688 2275,1700 2300,1700 v1(2325,1700) 2450,1700 2525,1625 2750,1625 2913,1463 2913,1338 2925,1325 3200,1325 3350,1325 3438,1413 v1(3650,1413) ; U4.8@2288,1362 2326,1362 v1(2338,1350) ; v1(3650,1513) 4063,1513 4175,1625 4175,1775 4250,1850 4347,1850 X1.48
  Bottom w12: v1(2325,1700) 2325,1375 2338,1363 v1(2338,1350) ; v1(3650,1413) v1(3650,1513)
SCCHG_EN: R23.1 U5.3 X1.21 | length 4140.8
  Top w12: R23.1@1725,1775 1730,1775 1733,1772 1733,1768 1738,1763 1768,1763 1775,1756 1775,1762 U5.3@1775,1763
  Top w16: R23.1@1725,1775 1725,1813 1725,1838 1813,1838 v4(1900,1750) ; R23.1@1733,1768 R23.1@1733,1783 ; v3(2800,1750) 2950,1600 3650,1600 3700,1650 4000,1650 4050,1700 v1(4050,1950) ; v1(4150,2800) 4150,3000 4251,3101 X1.21
  Bottom w16: v4(1900,1750) v3(2800,1750) ; v1(4050,1950) 4150,2050 4150,2150 v1(4150,2800)
SCOUT_-PG: X1.50
SCOUT_EN: R11.2 R12.1 X1.22 | length 3692.9
  Top w16: R11.2 2646,1480 2646,1550 2646,1596 2650,1600 2725,1600 2750,1575 2850,1475 2875,1450 2875,1313 2900,1288 3363,1288 3450,1375 3475,1375 v1(3738,1375) ; v1(3738,1613) 3750,1600 3900,1600 4000,1600 4088,1688 4088,1875 4088,1888 v1(4088,1938) ; v1(4200,2800) 4200,3000 4250,3050 4350,3050 4397,3097 X1.22
  Bottom w16: v1(3738,1375) 3738,1600 v1(3738,1613) ; v1(4088,1938) 4200,2050 4200,2150 v1(4200,2800)
SENSE: L2.P$2 R36.P$1 U8.10
SOLAR_-ON: R40.1 U10.P$4 X1.36 | length 2733.2
  Top w12: R40.1@2700,3325 R40.1@2700,3350 ; R40.1@2700,3350 R40.1@2713,3338 ; R40.1@2700,3350 R40.1@2713,3338 ; R40.1@2713,3338 2762,3338 R40.1@2713,3338
  Top w16: R40.1@2700,3325 2700,3300 2600,3200 2600,2950 2750,2800 v3(3075,2800) ; v2(3675,2700) 3725,2650 4150,2650 4200,2600 4200,2500 4250,2450 4350,2450 4400,2400 4397,2400 X1.36
  Top w24: R40.1@2705,3338 2762,3338 U10.P$4@2763,3349
  Bottom w16: v3(3075,2800) 3350,2800 3450,2700 v2(3675,2700)
SOLAR_CS1: X1.15
SOLAR_CS2: X1.14
SOLAR_CS3: X1.17
SOLAR_CS4: X1.16
SOLAR_CS5: X1.18
STRUT_GND: C1.1 H4.B3,2 R1.P$2
SUPERCAP_TEMP: X1.49
VBAT: C11.1 C16.P$1 C17.P$1 D1.A JP1.2 R9.2 R10.2 R13.2 R32.2 R36.P$2 U1.1 U1.2 U2.1 U2.2 U3.P$1 U8.9 X1.11 X1.12 X4.1 | length 7331.4
  Top w16: 1450,3100 R9.2@1450,3121 ; 1750,3100 R10.2@1771,3150 ; U3.P$1@2752,1263 2818,1263 R13.2@2825,1271 ; v2(3750,2700) 4200,2700 4250,2650 4450,2650 4500,2700 4500,2750 4500,3550 4450,3601 X1.11 X1.12
  Top w24: U2.1@1425,3448 U2.2@1475,3448 ; U1.1@1725,3448 1750,3448 U1.2@1775,3448
  Top w32: R13.2@2825,1271 2830,1271 2850,1250 2855,1246 3246,1246 3446,1246 3450,1250 3500,1300 v5(3500,1325)
  Top w45: 1750,3100 1925,2925 v5(2400,2925) ; v5(2650,2800) 2675,2775 2700,2750 v5(3125,2750)
  Top w50: U2.1@1425,3448 1425,3375 1350,3300 1350,3100 1450,3100 1750,3100 1750,3125 1750,3448
  Bottom w10: X4.1 X4.1@3501,1750
  Bottom w16: 3400,2650 3700,2650 v2(3750,2700)
  Bottom w32: v5(3500,1325) X4.1
  Bottom w45: v5(2400,2925) 2525,2925 v5(2650,2800) ; v5(3125,2750) 3300,2750 3400,2650 3400,2200 3450,2150 JP1.2
VBUS: R15.2 R19.1 R35.P$2 R37.2 R38.2 R39.2 R40.2 U9.5 X1.7 X1.8 X1.9 X1.10 | length 9064.2
  Top w12: R15.2@2575,1475 R15.2
  Top w16: R39.2 2200,1758 ; v1(2475,3225) 2475,2925 2425,2875 1200,2875 1125,2800 1100,2775 1100,1975 1175,1900 1525,1900 1575,1863 1838,1863 1900,1800 1950,1750 2175,1750 2193,1750 2200,1758 ; R15.2@2575,1475 R15.2 v1(2575,1575) ; v1(2575,1675) 2496,1755 2282,1755 2278,1758 R38.2 2200,1758 ; v1(2625,3275) 2646,3296 2646,3338 2646,3496 v2(2750,3600) ; v2(3000,3800) 3100,3900 4050,3900 4150,3800 4150,3788 ; v4(3325,3188) 3238,3100 3238,2850 3388,2700 3600,2700 3700,2600 3800,2600 3843,2558 R37.2 ; v4(3738,3363) 3742,3363 R35.P$2@3775,3396
  Top w24: U9.5@3702,3388 3710,3396 3775,3396 R35.P$2
  Top w45: 3800,3488 4150,3788
  Top w56: R35.P$2 3800,3488 ; 4150,3788 4250,3788
  Bottom w16: v1(2475,3225) 2525,3275 v1(2625,3275) ; v1(2575,1575) v1(2575,1675) ; v2(2750,3600) 2750,3750 2800,3800 v2(3000,3800) ; v4(3325,3188) 3388,3188 3500,3300 3575,3300 3663,3388 3713,3388 v4(3738,3363)
VMID: U4.10 X3.2 | length 1276.3
  Top w16: U4.10@2288,1413 2338,1413 v1(2363,1413) ; v4(2950,1400) v4(3150,1400)
  Bottom w16: v1(2363,1413) 2388,1413 2488,1325 2838,1325 2913,1400 v4(2950,1400) ; v4(3150,1400) X3.2
VSC_IN: C4.P$1 R17.1 U3.P$5 U4.11 U4.12 U5.6 | length 807.8
  Top w12: U5.6@1826,1670 2007,1670 2025,1688 2113,1688 2150,1650 2450,1650 2475,1625 2475,1500
VSOLAR: X1.3 X1.4 X1.5 X1.6 X7.2 | length 1498
  Top w56: X7.2@2900,4000 4300,4000 4300,4001 X1.4
VSUPERCAP: C6.P$1 R14.P$2 R20.1 U4.1 U4.2 X1.13 X3.1 | length 5806.8
  Top w16: X3.1 3050,1675 3088,1638 3638,1638 3688,1688 3825,1688 3888,1750 3963,1750 3975,1763 3975,1988 3975,2025 v4(4000,2050) ; v4(4100,2150) 4450,2150 4500,2200 4500,2350 4500,2600 4550,2650 v2(4550,3400)
  Top w32: 1700,1588 1700,1163 1750,1113 2763,1113 2800,1150 v5(2800,1200) ; 1800,1500 1850,1550
  Bottom w16: v4(4000,2050) v4(4100,2150) ; X1.13 4300,3501 4350,3450 4500,3450 v2(4550,3400)
  Bottom w32: v5(2800,1200) 2850,1200 3050,1400 X3.1
pads on no net: H1.B3,2 H2.B3,2 H3.B3,2 R5.TPAD U8.8 X6.1 X6.NO

## Polygon pours and split planes (outlines as drawn)
N$1 on Top "Top-N$1" (solid, remove dead copper, pour order 2): 1248,2396 1502,2396 1502,2246 1659,2246 1659,2230 1502,2230 1502,2198 1248,2198
N$3 on Top "Top-N$3" (solid, remove dead copper, pour order 4): 1348,2702 1348,2536 1717,2536 1717,2473 1886,2473 1886,2411 2067,2411 2067,2177 2017,2177 2017,2055 2059,2055 2059,2123 2284,2123 2284,2702
N$6 on Top "Top-N$6" (solid, remove dead copper, pour order 6): 1248,2509 1248,2417 1523,2417 1523,2255 1665,2255 1665,2348 1702,2348 1702,2509
GND on Top "Top-GND" (solid, remove dead copper, pour order 10): 1405,4055 1405,3793 1430,3793 1430,3720 1393,3720 1393,3593 1620,3593 1620,3630 1680,3630 1680,3593 1920,3593 1920,3630 1980,3630 1980,3345 1858,3345 1858,3508 1655,3508 1655,3345 1558,3345 1558,3508 1195,3508 1195,4055
GND on Top "Top-GND 1" (solid, remove dead copper, pour order 12): 1870,3720 1870,3805 1980,3805 1980,3720
GND on Top "Top-GND 2" (solid, remove dead copper, pour order 14): 2549,4274 2549,3845 2270,3845 2270,4055 2395,4055 2395,4274
GND on Top "Top-GND 3" (solid, remove dead copper, pour order 16): 1990,2402 1865,2402 1865,2452 1717,2452 1717,2334 1680,2334 1680,2121 1617,2121 1617,1930 2115,1930 2115,2109 2073,2109 2073,2040 2017,2040 2017,1984 1890,1984 1890,2027 1827,2027 1827,2230 1990,2230
GND on Top "Top-GND 4" (solid, remove dead copper, pour order 18): 2396,1855 2273,1855 2273,1984 2298,1984 2298,2702 2984,2702 2984,2617 2440,2617 2440,2248 2396,2248
GND on Top "Top-GND 5" (solid, remove dead copper, pour order 20): 3180,2198 3302,2198 3302,2423 3352,2423 3352,2563.83 3213.83,2702 2948,2702 2948,2617 3173,2617 3173,2605 3180,2605
GND on Top "Top-GND 6" (solid, remove dead copper, pour order 22): 2815,3302 2815,3023 2717,3023 2717,3302
GND on Top "Top-GND 7" (solid, remove dead copper, pour order 24): 3573,1927 3723,1927 3723,2248 3673,2248 3673,2409 3852,2409 3852,1692 3573,1692
GND on Top "Top-GND 8" (solid, remove dead copper, pour order 26): 3442,3033 4083,3033 4083,2767 3442,2767
GND on Top "Top-GND 9" (solid, remove dead copper, pour order 28): 1748,1174.17 1748,1352 2046,1352 2046,1271 2148,1271 2148,1621 2452,1621 2452,1548 2252,1548 2252,1300.83 2350.83,1202 2680,1202 2680,1327 2721,1327 2721,1227 2727,1227 2727,1148 1774.17,1148
GND on Top "Top-GND 10" (solid, remove dead copper, pour order 30): 4244,1644 4656,1644 4656,1532 4244,1532
N$16 on Top "Top-N$16" (solid, remove dead copper, pour order 32): 2411,2123 2411,2240 2461,2240 2461,2584 3159,2584 3159,2273 2521,2273 2521,2123
N$13 on Top "Top-N$13" (solid, remove dead copper, pour order 34): 2411,2098 2615,2098 2615,2259 2548,2259 2548,2115 2411,2115
SENSE on Top "Top-SENSE" (solid, remove dead copper, pour order 36): 3159,2215 3159,2067 2984,2067 2984,1955 2648,1955 2648,2073 2411,2073 2411,2090 2648,2090 2648,2215
VBUS on Top "Top-VBUS" (solid, remove dead copper, pour order 38): 4194,3831 4656,3831 4656,3669 4194,3669
N$18 on Top "Top-N$18" (solid, remove dead copper, pour order 40): 3436,2511 3436,2646 3519.83,2646 3571,2594.83 3571,2511
N$18 on Top "Top-N$18 1" (solid, remove dead copper, pour order 42): 2869,3306 2869,3019 3156,3019 3156,3224.49 3074.49,3306
VSC_IN on Top "Top-VSC_IN" (solid, remove dead copper, pour order 44): 2267,1430 2267,1527 2540,1527 2540,1302 2665,1302 2665,1223 2448,1223 2448,1411 2386,1411 2386,1430
VSOLAR on Top "Top-VSOLAR" (solid, remove dead copper, pour order 46): 4194,4031 4656,4031 4656,3869 4194,3869
VSUPERCAP on Top "Top-VSUPERCAP" (solid, remove dead copper, pour order 48): 1673,1379 1866,1379 1866,1513 1983,1513 1983,1430 2133,1430 2133,1510 2031,1510 2031,1606 1673,1606
N$44 on Top "Top-N$44" (solid, remove dead copper, pour order 50): 1665,2221 1665,2180 1559,2180 1559,2021 1596,2021 1596,1930 1203.18,1930 1148,1984.16 1148,2177 1517,2177 1517,2221
VBAT on Top "Top-VBAT" (solid, remove dead copper, pour order 52): 2411,2065 2411,2048 2486,2048 2486,1836 3448,1836 3448,1698 3552,1698 3552,1836 3553,1836 3553,1961 3690,1961 3690,2177 3180,2177 3180,2052 3011,2052 3011,1940 2627,1940 2627,2065
STRUT_GND on Top "Top-STRUT_GND" (solid, remove dead copper, pour order 54): 1194,4456 2206,4456 2206,4194 1406,4194 1406,4094 1194,4094
GND on Bottom "Bottom-GND" (solid, remove dead copper, pour order 8): 4706,4470 4706,1232 3801,1232 3801,995 995,995 995,4470

## Keep-outs
Keep-Out Layer:
  lines w0: 1000,1119 ccw(c1119,1119) 1119,1000 3796,1000 3796,1158 cw(c3875,1158) 3875,1237 4583,1237 ccw(c4583,1355) 4701,1355 4701,4347 ccw(c4583,4347) 4583,4465 1119,4465 ccw(c1118.5,4346.5) 1000,4347 1000,1119

## Other copper
Top:
  text "NI+" at 1737,4272 h42.5 r90
  text "NI+" at 1831,4272 h42.5 r90
  text "NI-" at 1925,4272 h42.5 r90
  text "RMF" at 4062,4260 h42.5 r90
  text "VSOL" at 4637,4085 h42.5 r90
  text "SW1" at 2750,3885 h42.5 r90
  text "VBUS" at 4637,3460 h42.5 r90
  text "SW2" at 3150,3347 h42.5 r90
  text "GND" at 1162,2935 h42.5 r90
  text "GND" at 4637,1722 h42.5 r90
  text "SUP" at 3087,1041 h42.5 r90
  text "MID" at 3202,1041 h42.5 r90
  text "GND" at 3322,1041 h42.5 r90
  text "BAT" at 3538,1041 h42.5 r90
  text "GND" at 3694,1041 h42.5 r90
Bottom:
  pour cut-out net N$56: 1000,1000 1010,1000 1010,1010 1000,1010
  pour cut-out net N$56: 1000,1000 1010,1000 1010,1010 1000,1010
  pour cut-out net N$56: 1000,1000 1010,1000 1010,1010 1000,1010
  pour cut-out net N$56: 1000,1000 1010,1000 1010,1010 1000,1010

## Silkscreen, mask and mechanical layers (free items; w line width, h text height)
Top Solder:
  text "NI+" at 1737,4272 h42.5 r90
  text "NI+" at 1831,4272 h42.5 r90
  text "NI-" at 1925,4272 h42.5 r90
  text "RMF" at 4062,4260 h42.5 r90
  text "VSOL" at 4637,4085 h42.5 r90
  text "SW1" at 2750,3885 h42.5 r90
  text "VBUS" at 4637,3460 h42.5 r90
  text "SW2" at 3150,3347 h42.5 r90
  text "GND" at 1162,2935 h42.5 r90
  text "GND" at 4637,1722 h42.5 r90
  text "SUP" at 3087,1041 h42.5 r90
  text "MID" at 3202,1041 h42.5 r90
  text "GND" at 3322,1041 h42.5 r90
  text "BAT" at 3538,1041 h42.5 r90
  text "GND" at 3694,1041 h42.5 r90
Dimension:
  lines w0: 1000,1119 ccw(c1119,1119) 1119,1000 3796,1000 3796,1158 cw(c3875,1158) 3875,1237 4583,1237 ccw(c4583,1355) 4701,1355 4701,4347 ccw(c4583,4347) 4583,4465 1119,4465 ccw(c1118.5,4346.5) 1000,4347 1000,1119

## Text inside footprints (layer, text, board x,y; h text height)
C1: tNames ">NAME" at 1290,4117 h77.5 r270; tValues ">VALUE" at 1160,4117 h77.5 r270
C2: tNames ">NAME" at 1815,3778 h77.5; tValues ">VALUE" at 1815,3648 h77.5
C3: tNames ">NAME" at 1485,3698 h77.5 r180; tValues ">VALUE" at 1485,3828 h77.5 r180
C4: tNames ">NAME" at 2363,1406 h77.5 r90; tValues ">VALUE" at 2513,1406 h77.5 r90
C5: tNames ">NAME" at 2000,1463 h77.5 r270; tValues ">VALUE" at 1800,1463 h77.5 r270
C6: tNames ">NAME" at 1875,1463 h77.5 r270; tValues ">VALUE" at 1675,1463 h77.5 r270
C7: tNames ">NAME" at 1898,2073 h77.5 r270; tValues ">VALUE" at 1783,2073 h77.5 r270
C8: tNames ">NAME" at 1513,2038 h77.5; tValues ">VALUE" at 1513,1888 h77.5
C9: tNames ">NAME" at 3513,2488 h77.5 r180; tValues ">VALUE" at 3513,2638 h77.5 r180
C10: tNames ">NAME" at 2240,1967 h77.5; tValues ">VALUE" at 2240,1852 h77.5
C11: tNames ">NAME" at 3679,1973 h77.5 r270; tValues ">VALUE" at 3564,1973 h77.5 r270
C12: tNames ">NAME" at 3665,3260 h77.5 r270; tValues ">VALUE" at 3385,3260 h77.5 r270; Top Overlay "+" at 3450,3300 h77.5 r270
C13: tNames ">NAME" at 3878,3260 h77.5 r270; tValues ">VALUE" at 3598,3260 h77.5 r270; Top Overlay "+" at 3663,3300 h77.5 r270
C14: tNames ">NAME" at 4065,3260 h77.5 r270; tValues ">VALUE" at 3785,3260 h77.5 r270; Top Overlay "+" at 3850,3300 h77.5 r270
C15: tNames ">NAME" at 1998,2292 h77.5 r270; tValues ">VALUE" at 1883,2292 h77.5 r270
C17: tNames ">NAME" at 3175,2050 h77.5 r90; tValues ">VALUE" at 3375,2050 h77.5 r90
C18: tNames ">NAME" at 1972,2385 h77.5; tValues ">VALUE" at 1972,2270 h77.5
C19: tNames ">NAME" at 2035,2115 h77.5 r180; tValues ">VALUE" at 2035,2230 h77.5 r180
C20: tNames ">NAME" at 1948,2435 h77.5 r270; tValues ">VALUE" at 1833,2435 h77.5 r270
C21: tNames ">NAME" at 1900,2563 h77.5 r270; tValues ">VALUE" at 1700,2563 h77.5 r270
C22: tNames ">NAME" at 2503,2265 h77.5; tValues ">VALUE" at 2503,2135 h77.5
C23: tNames ">NAME" at 3465,3315 h77.5 r90; tValues ">VALUE" at 3580,3315 h77.5 r90
C24: tNames ">NAME" at 2950,3175 h77.5 r180; tValues ">VALUE" at 2950,3325 h77.5 r180
D1: tNames ">NAME" at 2500,1938 h77.5 r90; tValues ">VALUE" at 2700,1938 h77.5 r90
D2: tNames ">NAME" at 1513,2363 h77.5 r90; tValues ">VALUE" at 1838,2363 h77.5 r90
D3: tNames ">NAME" at 2319,2525 h77.5; tValues ">VALUE" at 2319,2200 h77.5
D4: tNames ">NAME" at 3475,2325 h77.5 r90; tValues ">VALUE" at 3675,2325 h77.5 r90
D5: tNames ">NAME" at 3013,3525 h77.5 r270; tValues ">VALUE" at 2813,3525 h77.5 r270
JP1: tNames ">NAME" at 3615,2300 h77.5 r270; tValues ">VALUE" at 3435,2300 h77.5 r270
JP2: tNames ">NAME" at 1315,2838 h77.5 r270; tValues ">VALUE" at 1135,2838 h77.5 r270
JP3: tNames ">NAME" at 2835,3525 h77.5 r90; tValues ">VALUE" at 3015,3525 h77.5 r90
L1: tNames ">NAME" at 1225,2200 h77.5 r90; tValues ">VALUE" at 1575,2200 h77.5 r90
L2: tNames ">NAME" at 3100,2525 h77.5 r270; tValues ">VALUE" at 3050,2525 h77.5 r270
R1: tNames ">NAME" at 1313,3957 h77.5 r90; tValues ">VALUE" at 1463,3932 h77.5 r90
R2: tNames ">NAME" at 1990,3285 h77.5; tValues ">VALUE" at 1990,3170 h77.5
R3: tNames ">NAME" at 2060,3165 h77.5 r180; tValues ">VALUE" at 2060,3280 h77.5 r180
R4: tNames ">NAME" at 1915,3615 h77.5 r90; tValues ">VALUE" at 2030,3615 h77.5 r90
R5: tNames ">NAME" at 2425,3250 h77.5 r180; tValues ">VALUE" at 2425,3300 h77.5 r180
R6: tNames ">NAME" at 1648,3335 h77.5 r270; tValues ">VALUE" at 1533,3335 h77.5 r270
R7: tNames ">NAME" at 1615,3615 h77.5 r90; tValues ">VALUE" at 1730,3615 h77.5 r90
R8: tNames ">NAME" at 1648,3235 h77.5 r270; tValues ">VALUE" at 1533,3235 h77.5 r270
R9: tNames ">NAME" at 1485,3185 h77.5 r270; tValues ">VALUE" at 1370,3185 h77.5 r270
R10: tNames ">NAME" at 1835,3115 h77.5 r180; tValues ">VALUE" at 1835,3230 h77.5 r180
R11: tNames ">NAME" at 2603,1415 h77.5 r90; tValues ">VALUE" at 2718,1415 h77.5 r90
R12: tNames ">NAME" at 2641,1585 h77.5; tValues ">VALUE" at 2641,1470 h77.5
R13: tNames ">NAME" at 2860,1335 h77.5 r270; tValues ">VALUE" at 2745,1335 h77.5 r270
R14: tNames ">NAME" at 1875,1375 h77.5 r90; tValues ">VALUE" at 2025,1350 h77.5 r90
R15: tNames ">NAME" at 2540,1415 h77.5 r90; tValues ">VALUE" at 2655,1415 h77.5 r90
R16: tNames ">NAME" at 2110,1585 h77.5; tValues ">VALUE" at 2110,1470 h77.5
R17: tNames ">NAME" at 2448,1423 h77.5 r270; tValues ">VALUE" at 2333,1423 h77.5 r270
R18: tNames ">NAME" at 1984,1340 h77.5 r90; tValues ">VALUE" at 2099,1340 h77.5 r90
R19: tNames ">NAME" at 2317,1760 h77.5 r270; tValues ">VALUE" at 2202,1760 h77.5 r270
R20: tNames ">NAME" at 2010,1585 h77.5; tValues ">VALUE" at 2010,1470 h77.5
R21: tNames ">NAME" at 2448,1310 h77.5 r270; tValues ">VALUE" at 2333,1310 h77.5 r270
R22: tNames ">NAME" at 1665,1692 h77.5; tValues ">VALUE" at 1665,1577 h77.5
R23: tNames ">NAME" at 1735,1740 h77.5 r180; tValues ">VALUE" at 1735,1855 h77.5 r180
R24: tNames ">NAME" at 1648,2028 h77.5 r180; tValues ">VALUE" at 1648,2143 h77.5 r180
R25: tNames ">NAME" at 1940,1965 h77.5 r90; tValues ">VALUE" at 2055,1965 h77.5 r90
R26: tNames ">NAME" at 3438,2313 h77.5 r180; tValues ">VALUE" at 3463,2463 h77.5 r180
R27: tNames ">NAME" at 1965,2123 h77.5; tValues ">VALUE" at 1965,2008 h77.5
R28: tNames ">NAME" at 2123,1948 h77.5 r270; tValues ">VALUE" at 2008,1948 h77.5 r270
R29: tNames ">NAME" at 2060,1948 h77.5 r270; tValues ">VALUE" at 1945,1948 h77.5 r270
R30: tNames ">NAME" at 2372,1967 h77.5; tValues ">VALUE" at 2372,1852 h77.5
R31: tNames ">NAME" at 2060,2267 h77.5 r270; tValues ">VALUE" at 1945,2267 h77.5 r270
R32: tNames ">NAME" at 2434,1898 h77.5; tValues ">VALUE" at 2434,1783 h77.5
R33: tNames ">NAME" at 2098,1790 h77.5 r180; tValues ">VALUE" at 2098,1905 h77.5 r180
R34: tNames ">NAME" at 1967,1847 h77.5 r180; tValues ">VALUE" at 1967,1962 h77.5 r180
R35: tNames ">NAME" at 3750,3225 h77.5 r90; tValues ">VALUE" at 3900,3200 h77.5 r90
R36: tNames ">NAME" at 2869,2044 h77.5; tValues ">VALUE" at 2844,1894 h77.5
R37: tNames ">NAME" at 3778,2535 h77.5; tValues ">VALUE" at 3778,2420 h77.5
R38: tNames ">NAME" at 2260,1823 h77.5 r270; tValues ">VALUE" at 2145,1823 h77.5 r270
R39: tNames ">NAME" at 2198,1823 h77.5 r270; tValues ">VALUE" at 2083,1823 h77.5 r270
R40: tNames ">NAME" at 2710,3303 h77.5 r180; tValues ">VALUE" at 2710,3418 h77.5 r180
R41: tNames ">NAME" at 1415,3848 h77.5; tValues ">VALUE" at 1415,3733 h77.5
R42: tNames ">NAME" at 1885,3765 h77.5 r180; tValues ">VALUE" at 1885,3880 h77.5 r180
TP1: tNames ">NAME" at 1210,3050 h77.5; tValues ">VALUE" at 1250,3000 h1.55; tTest ">TP_SIGNAL_NAME" at 1200,2900 h62
TR1: tNames ">NAME" at 1813,3163 h77.5 r90; tValues ">VALUE" at 2013,3163 h77.5 r90
TR2: tNames ">NAME" at 1425,3175 h77.5 r90; tValues ">VALUE" at 1625,3175 h77.5 r90
TR3: tNames ">NAME" at 2825,1525 h77.5 r270; tValues ">VALUE" at 2625,1525 h77.5 r270
U1: tNames ">NAME" at 1675,3475 h77.5 r90; tValues ">VALUE" at 1963,3462.5 h77.5 r90
U2: tNames ">NAME" at 1375,3475 h77.5 r90; tValues ">VALUE" at 1663,3462.5 h77.5 r90
U3: tNames ">NAME" at 2837.8,1221.26 h77.5 r180; tValues ">VALUE" at 2847.64,1428 h77.5 r180
U4: tNames ">NAME" at 2062.2,1498.43 h77.5; tValues ">VALUE" at 2062.2,1262 h77.5
U5: tNames ">NAME" at 1855.12,1850.8 h77.5 r270; tValues ">VALUE" at 1689,1850.8 h77.5 r270
U6: tNames ">NAME" at 1622.05,2308.27 h77.5; tValues ">VALUE" at 1602.36,2042 h77.5
U7: tNames ">NAME" at 3609.26,2312.2 h77.5 r90; tValues ">VALUE" at 3816,2302.36 h77.5 r90
U8: tNames ">NAME" at 2212.2,2167.43 h77.5; tValues ">VALUE" at 2212.2,1931 h77.5
U9: tNames ">NAME" at 3725,3425 h77.5 r270; tValues ">VALUE" at 3515,3425 h77.5 r270
U10: tNames ">NAME" at 2878.74,3537.8 h77.5 r270; tValues ">VALUE" at 2672,3547.64 h77.5 r270
X1: tNames ">NAME" at 4172,4301 h108.5; tValues ">VALUE" at 4172,4226 h108.5
X2: tNames ">NAME" at 1603.94,4245 h77.5; tValues ">VALUE" at 1603.94,4183 h77.5; Top Overlay "1" at 1900,3999 h77.5
X3: tNames ">NAME" at 3346.06,1405 h77.5 r180; tValues ">VALUE" at 3346.06,1467 h77.5 r180; Top Overlay "1" at 3050,1651 h77.5 r180
X4: tNames ">NAME" at 3697.64,1405 h77.5 r180; tValues ">VALUE" at 3697.64,1467 h77.5 r180; Top Overlay "1" at 3500,1651 h77.5 r180
X5: bNames ">NAME" at 3027.36,2855 h77.5 r180; bValues ">VALUE" at 3027.36,2917 h77.5 r180; Bottom Overlay "1" at 3225,3101 h77.5 r180
X6: Bottom Overlay "C" at 4088,3917 h108.5; Bottom Overlay "NO" at 3738,3917 h108.5; Bottom Overlay "NC" at 3513,3917 h108.5
X7: bNames ">NAME" at 2555,4097.64 h77.5 r90; bValues ">VALUE" at 2617,4097.64 h77.5 r90; Bottom Overlay "1" at 2801,3900 h77.5 r90